# Altium PCB FRONT-UNIT.PcbDoc (part 2 of 2)
Units mm, origin at the board's own origin, x right, y up, seen from the top; angles counter-clockwise.
Board outline 187.14 x 77.14 mm, 2 copper layers (Top Layer, Top, Bottom Layer, Bottom); 94 components, 75 nets, 400 pads, 116 vias.
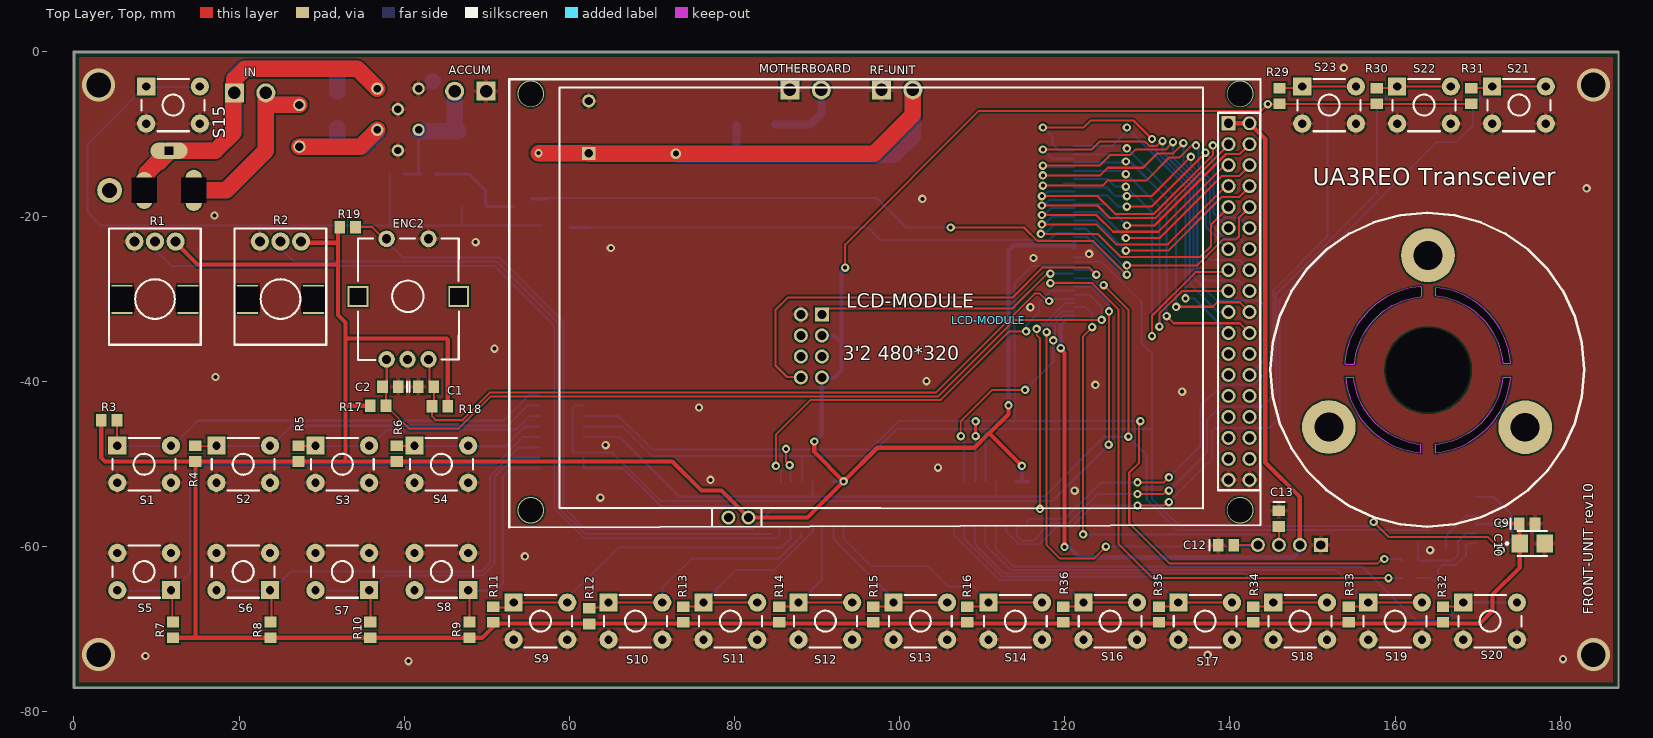
[diagram p0: Top Layer, Top view]

## Silkscreen, mask and mechanical layers (free items; w line width, h text height) (continued)
Top Overlay, Top Silk: (continued)
  lines w0.3: 144.9,-38.57 145.189,-35.271 146.046,-32.072 147.445,-29.07 149.345,-26.357 151.687,-24.016 154.4,-22.116 157.402,-20.716 160.601,-19.859 163.9,-19.57 167.199,-19.859 170.398,-20.716 173.4,-22.116 176.113,-24.016 178.455,-26.357 180.354,-29.07 181.754,-32.072 182.611,-35.271 182.9,-38.57 182.611,-41.87 181.754,-45.069 180.354,-48.07 178.455,-50.783 176.113,-53.125 173.4,-55.025 170.398,-56.425 167.199,-57.282 163.9,-57.57 160.601,-57.282 157.402,-56.425 154.4,-55.025 151.687,-53.125 149.345,-50.783 147.445,-48.07 146.046,-45.069 145.189,-41.87 144.9,-38.57
  text "UA3REO Transceiver" at 150,-16.2 h2.08
  text "FRONT-UNIT rev10" at 184,-68.2 h1.25 r90
Bottom Overlay, Bot Silk:
  text "WOLF" at 101.4,-23.2 h12

## Text inside footprints (layer, text, board x,y; h text height)
ENCODER_MAIN: Mechanical 2, Bot Assy "BOARD EDGE" at 149.397,-58.134 h0.42
ESP-8266: Bottom Overlay, Bot Silk "ESP8266" at 76.703,-29.417 h1.67 r90; Bottom Overlay, Bot Silk "ESP-01" at 81.483,-30.19 h1.67 r90
LCD-MODULE: Top Overlay, Top Silk "3'2 480*320" at 93.091,-37.406 h1.67